# EAGLE board razor_6dof (EAGLE 5.10)
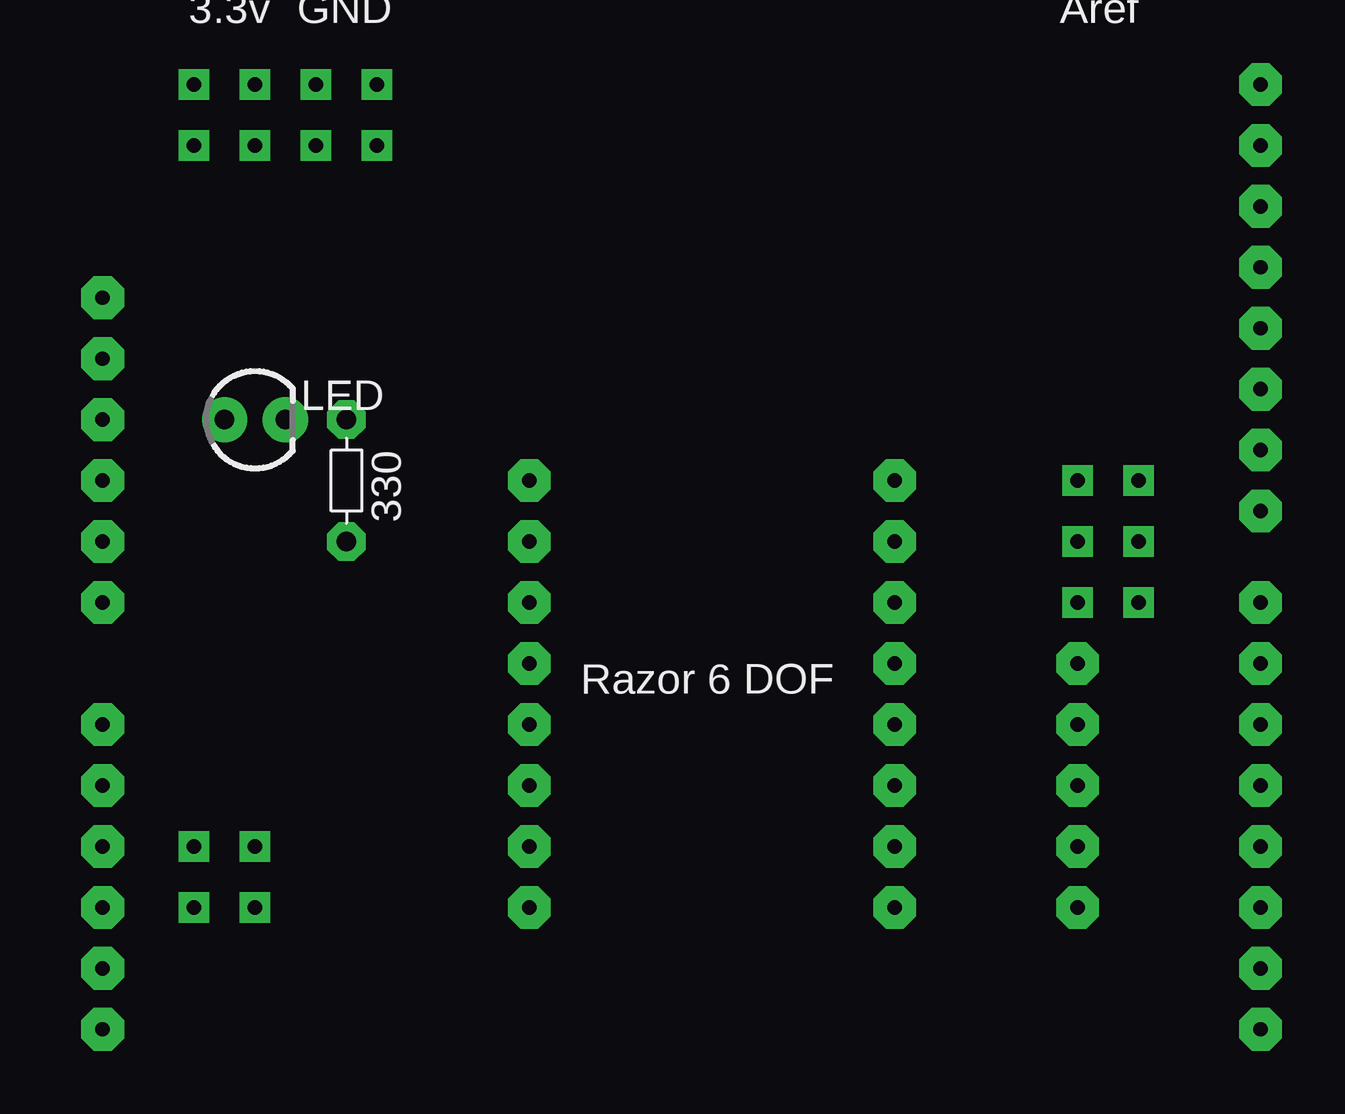
[diagram p0: board, top side]
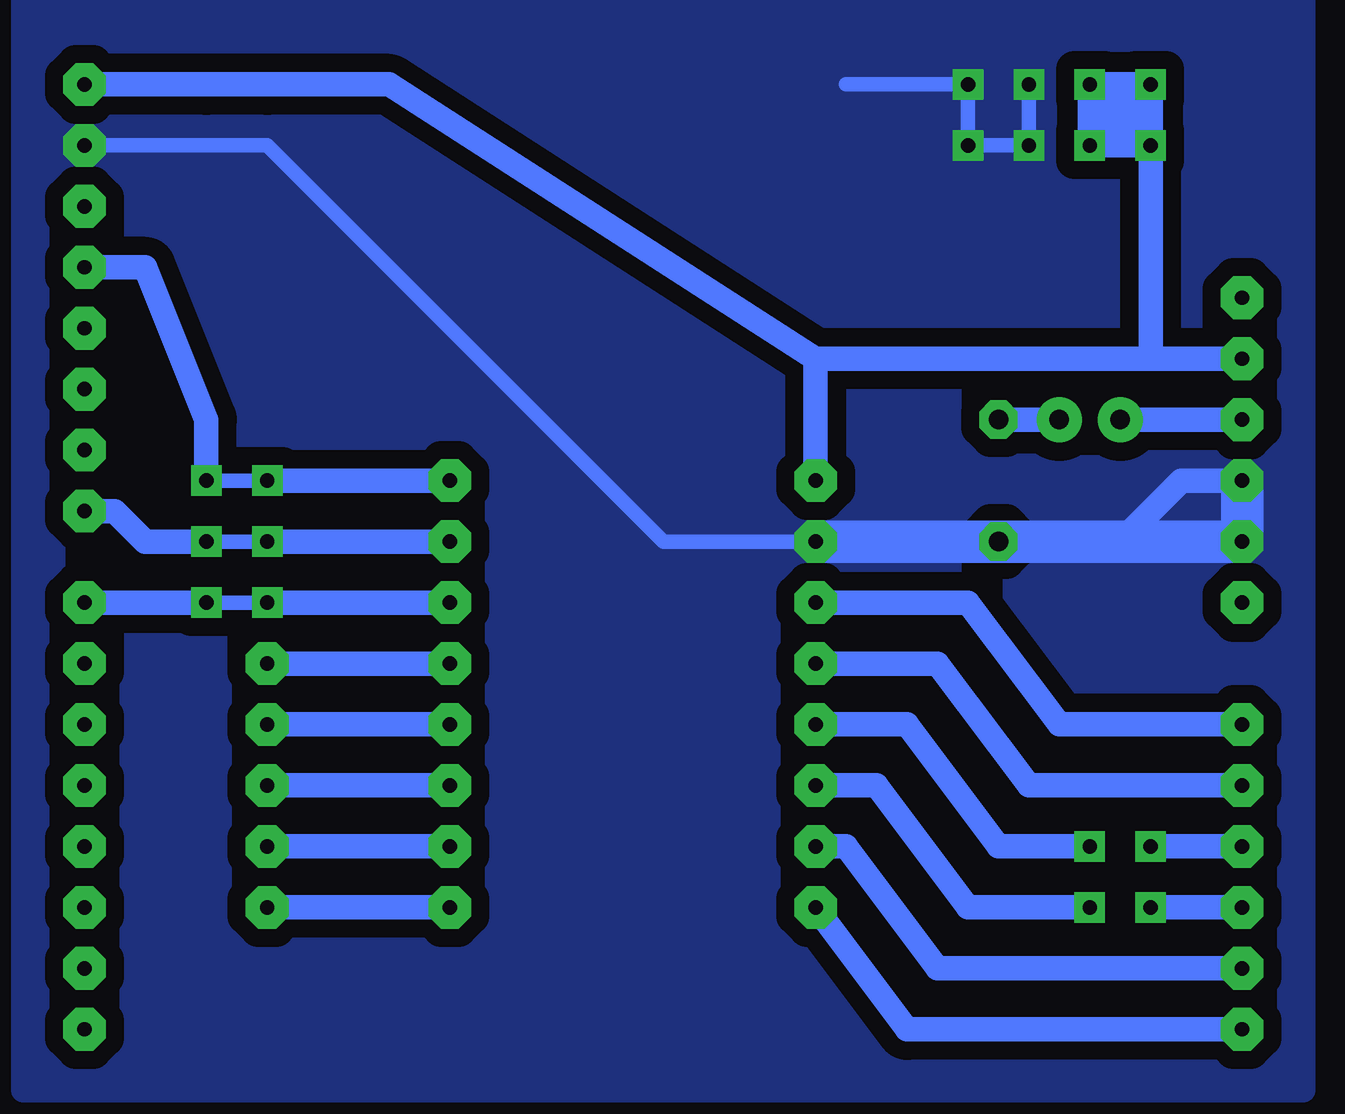
[diagram p1: board, bottom side, seen from below]

No outline drawn. Coordinates in mm, seen from the top.
Copper layers (1*16): Top 0.035mm / dielectric 1.5mm / Bottom 0.035mm
Design rules "default *": minimum track width 10mil, minimum drill 24mil, track to track 30mil, track to pad 30mil, pad to pad 8mil, via to via 8mil, smd to smd 8mil, copper to edge 40mil, drill to drill 8mil, minimum pad ring 10mil, minimum via ring 8mil, stop-mask expansion 4mil, vias tented up to drill 0mil, thermal gap 10mil

## Footprints (pad centres in the part's own frame; a part is rotated, then mirrored left to right if it is on the bottom)
R-5 = drill 0.813 pad 1.6 octagon: 1 -2.54,0; 2 2.54,0
LED3MM = drill 0.813 pad 1.88 round: A -1.27,0; K 1.27,0

## Placement (x,y rotation side)
330  [R-5]  15.24,27.94 270 top
LED  [LED3MM]  11.43,30.48 0 top

## Library data of the parts
330 = discrete
LED = SparkFun

## Nets
S$1: 330.1 LED.K
S$10: LED.A

## Tracks (layer width: path | path; a pad name or v marks a point on that pad's centre or on a via)
GND  (via drill 0.6 pad 1.27, 0.6 pad 1.78)
  Bottom 0.61: v53.34,41.91 45.72,41.91 29.21,25.4 v22.86,25.4 | v13.97,44.45 v13.97,41.91 v16.51,41.91 v16.51,44.45 21.59,44.45
  Bottom 1.016: v5.08,27.94 7.62,27.94 10.16,25.4 15.24,25.4
  Bottom 1.778: v5.08,27.94 v5.08,25.4 15.24,25.4 v22.86,25.4
  pour Bottom: 2.54,2.54 2.54,48.26 55.88,48.26 55.88,2.54
S$1
  Bottom 1.016: LED.K 330.1
S$2  (via drill 0.6 pad 1.78)
  Bottom 1.016: v22.86,22.86 16.51,22.86 12.7,17.78 11.43,17.78 8.89,17.78 v5.08,17.78
S$3  (via drill 0.6 pad 1.78)
  Bottom 1.016: v38.1,15.24 v45.72,15.24
S$4  (via drill 0.6 pad 1.78)
  Bottom 1.016: v38.1,12.7 v45.72,12.7
S$5  (via drill 0.6 pad 1.27, 0.6 pad 1.78)
  Bottom 1.016: v5.08,12.7 v8.89,12.7
S$6  (via drill 0.6 pad 1.27, 0.6 pad 1.78)
  Bottom 0.61: v45.72,27.94 48.26,27.94
  Bottom 1.016: v38.1,27.94 v45.72,27.94 | v53.34,36.83 50.8,36.83 48.26,30.48 48.26,27.94
S$7  (via drill 0.6 pad 1.78)
  other vias: 5.08,22.86
S$8  (via drill 0.6 pad 1.27)
  other vias: 48.26,27.94
S$9  (via drill 0.6 pad 1.78)
  Bottom 1.016: v22.86,10.16 19.05,5.08 v5.08,5.08
S$10  (via drill 0.6 pad 1.78)
  Bottom 1.016: v5.08,30.48 LED.A
S$11  (via drill 0.6 pad 1.27, 0.6 pad 1.78)
  Bottom 1.016: v5.08,10.16 v8.89,10.16
S$12  (via drill 0.6 pad 1.78)
  other vias: 5.08,35.56
S$13  (via drill 0.6 pad 1.78)
  other vias: 53.34,5.08
S$14  (via drill 0.6 pad 1.78)
  other vias: 53.34,7.62
S$15  (via drill 0.6 pad 1.78)
  other vias: 53.34,10.16
S$16  (via drill 0.6 pad 1.78)
  other vias: 53.34,12.7
S$17  (via drill 0.6 pad 1.78)
  other vias: 53.34,15.24
S$18  (via drill 0.6 pad 1.78)
  other vias: 53.34,17.78
S$19  (via drill 0.6 pad 1.78)
  other vias: 53.34,20.32
S$20  (via drill 0.6 pad 1.27, 0.6 pad 1.78)
  Bottom 0.61: v45.72,22.86 v48.26,22.86
  Bottom 1.016: v38.1,22.86 v45.72,22.86 | v48.26,22.86 v53.34,22.86
S$22  (via drill 0.6 pad 1.78)
  other vias: 53.34,29.21
S$23  (via drill 0.6 pad 1.78)
  other vias: 53.34,31.75
S$24  (via drill 0.6 pad 1.78)
  other vias: 53.34,34.29
S$25  (via drill 0.6 pad 1.78)
  Bottom 1.016: v22.86,20.32 17.78,20.32 13.97,15.24 v5.08,15.24
S$26  (via drill 0.6 pad 1.78)
  other vias: 53.34,39.37
S$27  (via drill 0.6 pad 1.78)
  Bottom 1.016: v22.86,12.7 21.59,12.7 17.78,7.62 v5.08,7.62
S$28  (via drill 0.6 pad 1.27, 0.6 pad 1.78)
  Bottom 1.016: v53.34,44.45 48.26,44.45 45.72,44.45 40.64,44.45 22.86,33.02 | v5.08,33.02 8.89,33.02 | 8.89,33.02 22.86,33.02 | 22.86,33.02 v22.86,27.94 | 8.89,33.02 v8.89,41.91 | v8.89,41.91 v8.89,44.45 v11.43,44.45 v11.43,41.91 v8.89,41.91
S$29  (via drill 0.6 pad 1.27, 0.6 pad 1.78)
  Bottom 1.016: v22.86,15.24 20.32,15.24 16.51,10.16 v11.43,10.16
S$32  (via drill 0.6 pad 1.27, 0.6 pad 1.78)
  Bottom 1.016: v22.86,17.78 19.05,17.78 15.24,12.7 v11.43,12.7
S$38  (via drill 0.6 pad 1.27, 0.6 pad 1.78)
  Bottom 0.61: v45.72,25.4 v48.26,25.4
  Bottom 1.016: v38.1,25.4 v45.72,25.4 | v48.26,25.4 50.8,25.4 52.07,26.67 v53.34,26.67
S$40  (via drill 0.6 pad 1.78)
  Bottom 1.016: v38.1,20.32 v45.72,20.32
S$41  (via drill 0.6 pad 1.78)
  Bottom 1.016: v38.1,17.78 v45.72,17.78
S$44  (via drill 0.6 pad 1.78)
  Bottom 1.016: v38.1,10.16 v45.72,10.16
(copper drawn outside any net)
  shapes: Bottom area x1

## Text on the board
tPlace: 3.3v | GND | Aref | Razor 6 DOF